# Altium PCB PERfECT-PRO.PcbDoc
Units mil, origin at the board's own origin, x right, y up, seen from the top; angles counter-clockwise.
Board outline 6000 x 4000 mil, 2 copper layers (Top Layer, Bottom Layer); 6 components, 7 nets, 127 pads, 0 vias.
Unrouted connection lines stored in the file: 7.
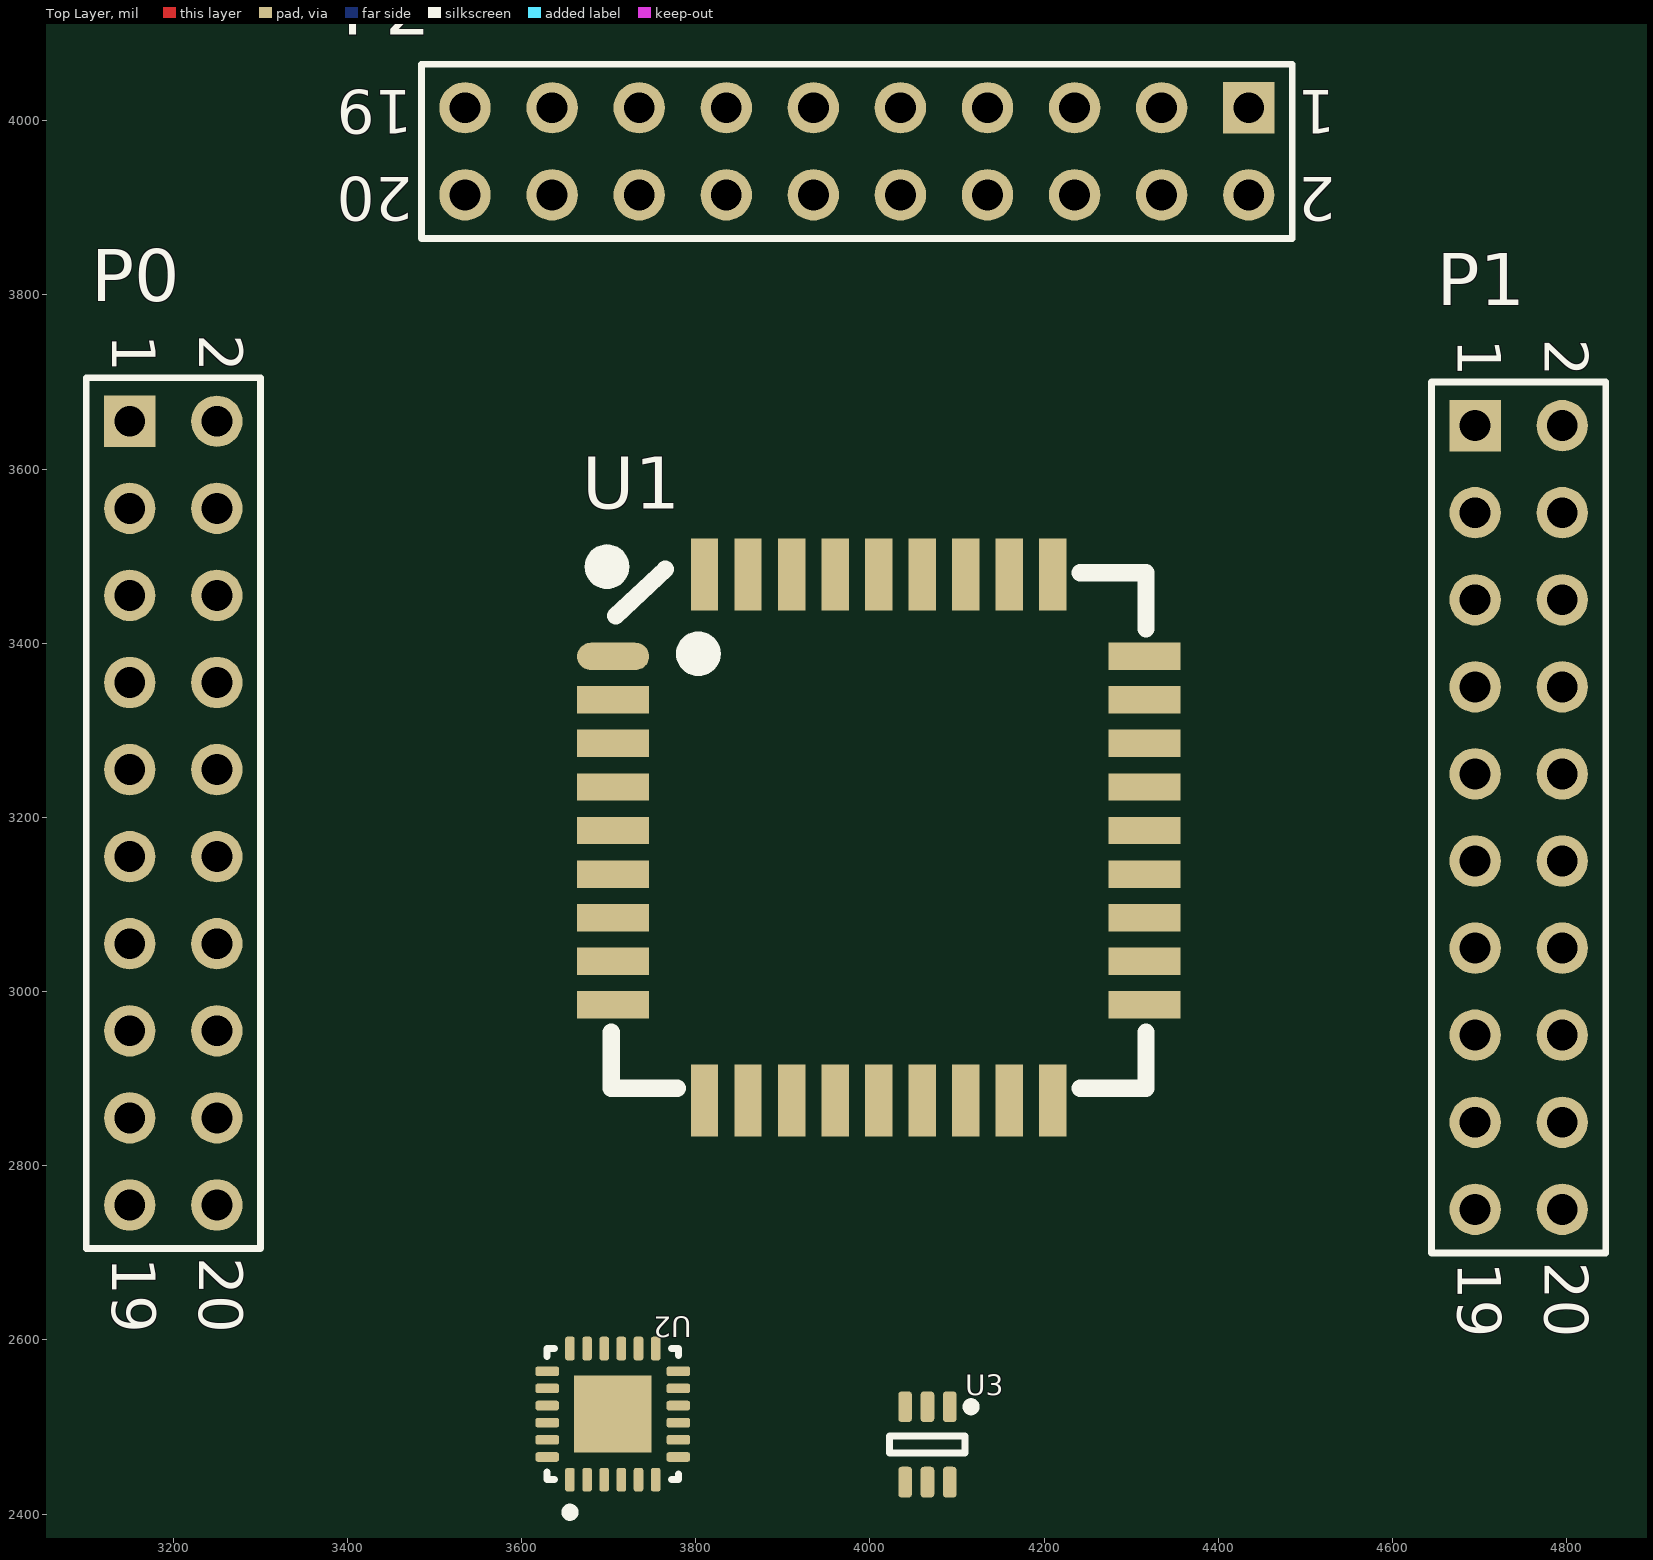
[diagram p0: Top Layer view]
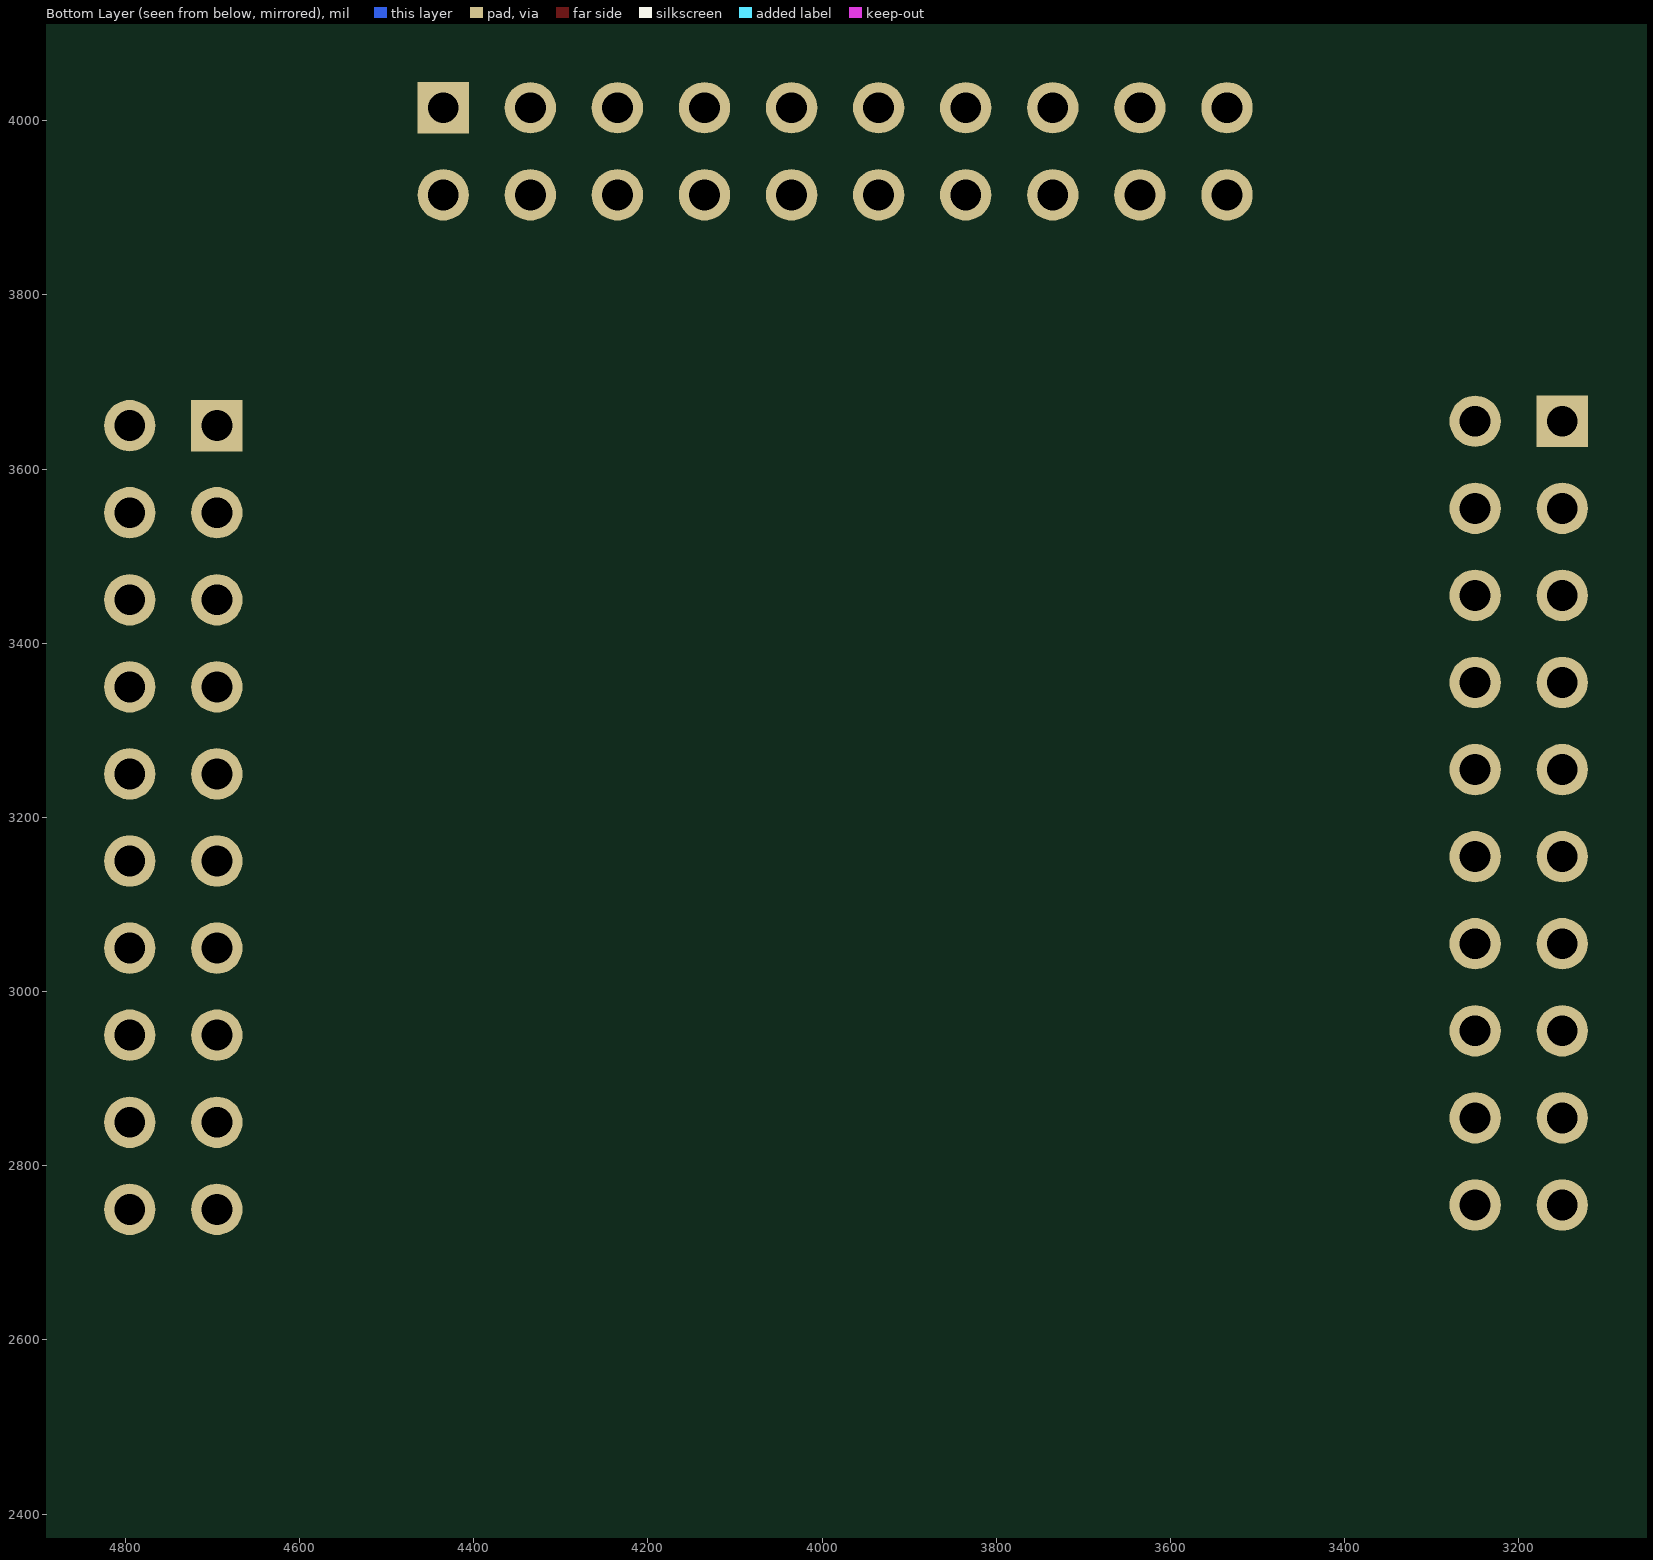
[diagram p1: Bottom Layer view, seen from below]

## Layer stack, top to bottom
Top Solder: solder mask 0.4, Solder Resist, Dk 3.5
Top Layer: signal copper 1.4
Dielectric 1: dielectric 12.6, FR-4, Dk 4.8
Bottom Layer: signal copper 1.4
Bottom Solder: solder mask 0.4, Solder Resist, Dk 3.5

## Board outline
1000,1000 7000,1000 7000,5000 1000,5000

## Design rules (kind name [scope] priority, off if disabled: settings)
Clearance [All] p1: gap=10 ignorepadtopadclearanceinfootprint=TRUE except(0: Arc-Hole Track-Hole SMDPad-Hole THPad-Hole Via-Hole Fill-Hole Poly-Hole Region-Hole Text-Hole)
PolygonConnect [All] p1: connectstyle=Relief reliefconductorwidth=10 reliefentries=4 polygonreliefangle="90 Angle" airgapwidth=10
RoutingVias [All] p1: holewidth=28 width=50 viastyle="Through Hole" minholewidth=28 minwidth=50 maxholewidth=28 maxwidth=50
SolderMaskExpansion [All] p1: expansion=4 istentingtop=FALSE
Width [All] p1: maxlimit=10 minlimit=10 preferedwidth=10
30 further rules are at their usual default settings.

## Components (designator, comment, footprint, x,y, rotation, side; value= is the part's Value field where it differs from the comment)
P0 "Header 10X2" HDR2X10 3150,3655 r270 top
P1 "Header 10X2" HDR2X10 4695,3650 r270 top
P2 "Header 10X2" HDR2X10 4435,4015 r180 top
U1 "PERfECTcoreV5" PERfECTcore36 3705,3385 r0 top
U2 "CP2104N" 24-QFN 3704.7,2514.84 r90 top
U3 "PESD5V0L5UY" SOT65P210X110-6N 4065,2480 r270 top value=ESD

## Footprints (in the part's own frame and the unit in brackets; to place one, negate y for a bottom-side part, rotate by r counter-clockwise, add the part's x,y. Pads: shape width x height; smd on the part's side, far side on the other; paste and mask are expansions set on the pad)
24-QFN [mm]
  rrect50% 0.69x0.28 smd: 1(-1.912,1.25) 2(-1.912,0.75) 3(-1.912,0.25) 4(-1.912,-0.25) 5(-1.912,-0.75) 6(-1.912,-1.25) 13(1.913,-1.25) 14(1.913,-0.75) 15(1.913,-0.25) 16(1.913,0.25) 17(1.913,0.75) 18(1.913,1.25)
  rrect50% 0.28x0.69 smd: 7(-1.25,-1.913) 8(-0.75,-1.913) 9(-0.25,-1.913) 10(0.25,-1.913) 11(0.75,-1.913) 12(1.25,-1.913) 19(1.25,1.913) 20(0.75,1.913) 21(0.25,1.913) 22(-0.25,1.913) 23(-0.75,1.913) 24(-1.25,1.913)
  rect 2.25x2.25 smd paste-1.3: 25(0,0)
  silkscreen extent -2.99,-1.91 1.91,1.91, body extent -2.05,-2.04 2.05,2.06, height 1.08
HDR2X10 [mm] "Connector; Header; 10x2 Position"
  rect 1.5x1.5 hole 0.9: 1(0,0)
  round 1.5 hole 0.9: 2(0,2.54) 3(2.54,0) 4(2.54,2.54) 5(5.08,0) 6(5.08,2.54) 7(7.62,0) 8(7.62,2.54) 9(10.16,0) 10(10.16,2.54) 11(12.7,0) 12(12.7,2.54) 13(15.24,0) 14(15.24,2.54) 15(17.78,0) 16(17.78,2.54) 17(20.32,0) 18(20.32,2.54) 19(22.86,0) 20(22.86,2.54)
  silkscreen extent -1.27,-1.27 24.13,3.81
PERfECTcore36 [mm]
  oval 2.1x0.8 smd: 1(0,0)
  rect 2.1x0.8 smd: 2(0,-1.27) 3(0,-2.54) 4(0,-3.81) 5(0,-5.08) 6(0,-6.35) 7(0,-7.62) 8(0,-8.89) 9(0,-10.16) 19(15.494,-10.16) 20(15.494,-8.89) 21(15.494,-7.62) 22(15.494,-6.35) 23(15.494,-5.08) 24(15.494,-3.81) 25(15.494,-2.54) 26(15.494,-1.27) 27(15.494,0)
  rect 0.8x2.1 smd: 10(2.667,-12.954) 11(3.937,-12.954) 12(5.207,-12.954) 13(6.477,-12.954) 14(7.747,-12.954) 15(9.017,-12.954) 16(10.287,-12.954) 17(11.557,-12.954) 18(12.827,-12.954) 28(12.827,2.391) 29(11.557,2.391) 30(10.287,2.391) 31(9.017,2.391) 32(7.747,2.391) 33(6.477,2.391) 34(5.207,2.391) 35(3.937,2.391) 36(2.667,2.391)
  silkscreen extent -0.82,-12.6 15.54,3.26, body extent 0.13,-12.68 15.13,2.32, height 0.51
SOT65P210X110-6N [mm]
  rrect50% 0.9x0.4 smd mask+0.076: 1(-1.1,0.675) 2(-1.1,0.025) 3(-1.1,-0.625) 4(1.1,-0.625) 5(1.1,0.025) 6(1.1,0.675)
  silkscreen extent -1.22,-1.07 0.25,1.43, body extent -1.1,-0.97 1.1,1.01, height 0.99

## Part data
P0 P1 P2: "Header, 10-Pin, Dual row", LatestRevisionDate=17-Jul-2002, LatestRevisionNote="Re-released for DXP Platform.", Publisher="Altium Limited"
U1: "This is the 5th version of PERfEC core.https://github.com/WISE-PERfECT/PERfECT"
U2: "IC BRIDGE USB TO UART 24QFN", Manufacturer="Silicon Labs", PartNumber=C47742, Part_Footprint=24QFN, Vendor=LCSC
U3: "TVS SOT-363 RoHS", Manufacturer=Yenji, PartNumber=PESD5V0L5UY, Vendor=LCSC

## Nets (pads, with @x,y where several pads share a name; then routed paths per layer and width w, separated by ;. In a path a pad name is that pad's centre, name@x,y a point inside that pad or via, vN(x,y) a via of type N, cw(c..) or ccw(c..) an arc to the next point about the centre after c; other vN are vias at no path point)
5VUSB: U2.7 U2.8 U3.5
DGND: U2.2 U2.25 U3.2
NetU2_5: U2.5 U2.6
UART_SIN: U2.21
UART_SOUT: U2.20
USB_D+: U2.3 U3.1
USB_D-: U2.4 U3.6
pads on no net: P0.1 P0.2 P0.3 P0.4 P0.5 P0.6 P0.7 P0.8 P0.9 P0.10 P0.11 P0.12 P0.13 P0.14 P0.15 P0.16 P0.17 P0.18 P0.19 P0.20 P1.1 P1.2 P1.3 P1.4 P1.5 P1.6 P1.7 P1.8 P1.9 P1.10 P1.11 P1.12 P1.13 P1.14 P1.15 P1.16 P1.17 P1.18 P1.19 P1.20 P2.1 P2.2 P2.3 P2.4 P2.5 P2.6 P2.7 P2.8 P2.9 P2.10 P2.11 P2.12 P2.13 P2.14 P2.15 P2.16 P2.17 P2.18 P2.19 P2.20 U1.1 U1.2 U1.3 U1.4 U1.5 U1.6 U1.7 U1.8 U1.9 U1.10 U1.11 U1.12 U1.13 U1.14 U1.15 U1.16 U1.17 U1.18 U1.19 U1.20 U1.21 U1.22 U1.23 U1.24 U1.25 U1.26 U1.27 U1.28 U1.29 U1.30 U1.31 U1.32 U1.33 U1.34 U1.35 U1.36 U2.1 U2.9 U2.10 U2.11 U2.12 U2.13 U2.14 U2.15 U2.16 U2.17 U2.18 U2.19 U2.22 U2.23 U2.24 U3.3 U3.4

## Text inside footprints (layer, text, board x,y; h text height)
P0: Top Overlay "20" at 3230,2695 h50 r270; Top Overlay "19" at 3130,2695 h50 r270; Top Overlay "1" at 3130,3755 h50 r270; Top Overlay "2" at 3230,3755 h50 r270
P1: Top Overlay "20" at 4775,2690 h50 r270; Top Overlay "19" at 4675,2690 h50 r270; Top Overlay "1" at 4675,3750 h50 r270; Top Overlay "2" at 4775,3750 h50 r270
P2: Top Overlay "20" at 3475,3935 h50 r180; Top Overlay "19" at 3475,4035 h50 r180; Top Overlay "1" at 4535,4035 h50 r180; Top Overlay "2" at 4535,3935 h50 r180